# EAGLE board regulador_v1 (EAGLE 7.6.0)
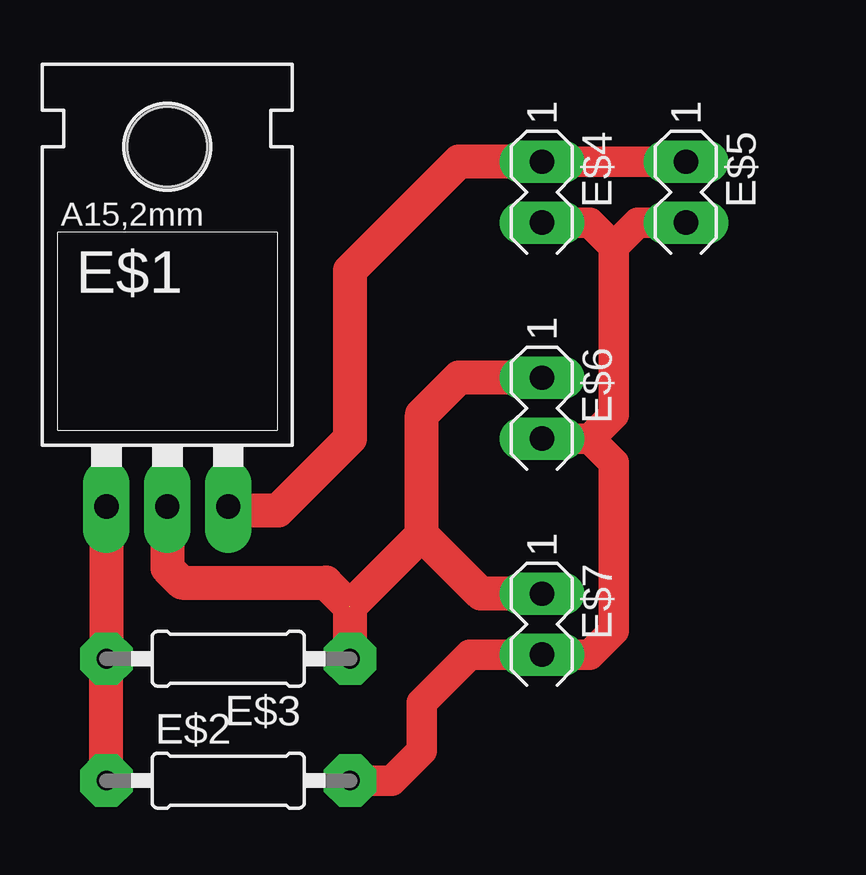
[diagram p0: board, top side]
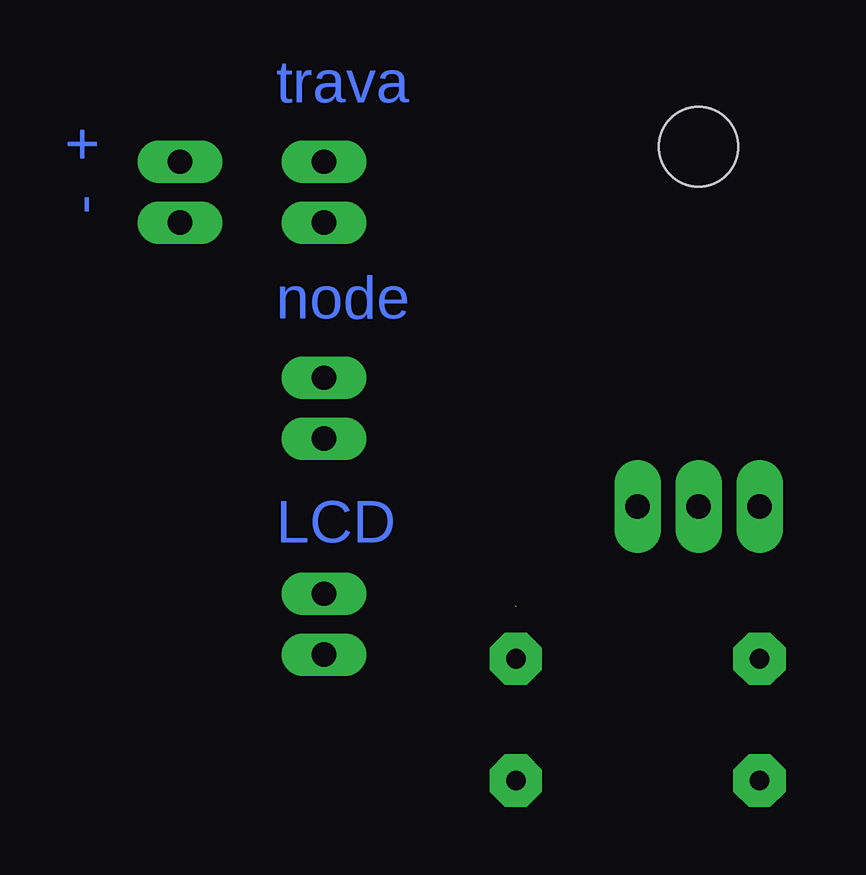
[diagram p1: board, bottom side, seen from below]

No outline drawn. Coordinates in mm, seen from the top.
Copper layers (1*16): Top 0.035mm / dielectric 1.5mm / Bottom 0.035mm
Design rules "default": minimum track width 10mil, minimum drill 24mil, track to track 8mil, track to pad 8mil, pad to pad 8mil, via to via 8mil, smd to smd 8mil, copper to edge 40mil, drill to drill 8mil, minimum pad ring 10mil, minimum via ring 8mil, stop-mask expansion 4mil, vias tented up to drill 0mil, thermal gap 10mil

## Footprints (pad centres in the part's own frame; a part is rotated, then mirrored left to right if it is on the bottom)
317TL = drill 1.016 pad 1.93 long: 1 -2.54,-3.81; 2 0,-3.81; 3 2.54,-3.81 | hole 3.302: 0,11.176
0207/10 = drill 0.813 pad 2.184 octagon: 1 -5.08,0; 2 5.08,0
MA03-1 = drill 1.016 pad 1.778 long: 1 -2.54,0; 2 0,0

## Placement (x,y rotation side)
E$1  [317TL]  72.39,46.99 0 top
E$2  [0207/10]  74.93,31.75 0 top
E$3  [0207/10]  74.93,36.83 180 top
E$4  [MA03-1]  88,55 270 top
E$5  [MA03-1]  94,55 270 top
E$6  [MA03-1]  88,46 270 top
E$7  [MA03-1]  88,37 270 top

## Library data of the parts
E$1 = v-reg
E$2 E$3 = eagle-ltspice
E$4-E$7 = con-lstb

## Nets
S$1: E$1.1 E$2.1 E$3.2
S$2: E$1.2 E$3.1 E$6.1 E$7.1
S$3: E$2.2 E$4.2 E$6.2 E$7.2
S$4: E$1.3 E$4.1 E$5.1

## Tracks (layer width: path | path; a pad name or v marks a point on that pad's centre or on a via)
S$1
  Top 1.422: E$1.1 E$3.2 E$2.1
S$2  (1 unrouted)
  Top 1.422: E$6.1 84.54,48.54 83,47 83,42 | 80.18,37 E$3.1 80.01,39.01 83,42 | 80,37 80,39 79,40 73,40 72.39,40.61 E$1.2 | E$7.1 85.46,39.54 83,42
S$3
  Top 1.27: E$2.2 81.75,31.75 83,33 83,35 85,37 E$7.2 90,37 91,38 91,45 90,46 | E$4.2 90,55 91,54 | 91,54 91,47 90,46 | 90,46 E$6.2 | 91,54 92,55 94,55
S$4
  Top 1.27: E$4.1 E$5.1
  Top 1.422: E$4.1 84.54,57.54 80,53 80,46 77,43 75.11,43 E$1.3

## Text on the board
Bottom: trava | - + | node | LCD